# Altium PCB Microcontroller_Redo.PcbDoc
Units mil, origin at the board's own origin, x right, y up, seen from the top; angles counter-clockwise.
Board outline 3346.46 x 3346.46 mil, 2 copper layers (Top Layer, Bottom Layer); 32 components, 73 nets, 320 pads, 160 vias.
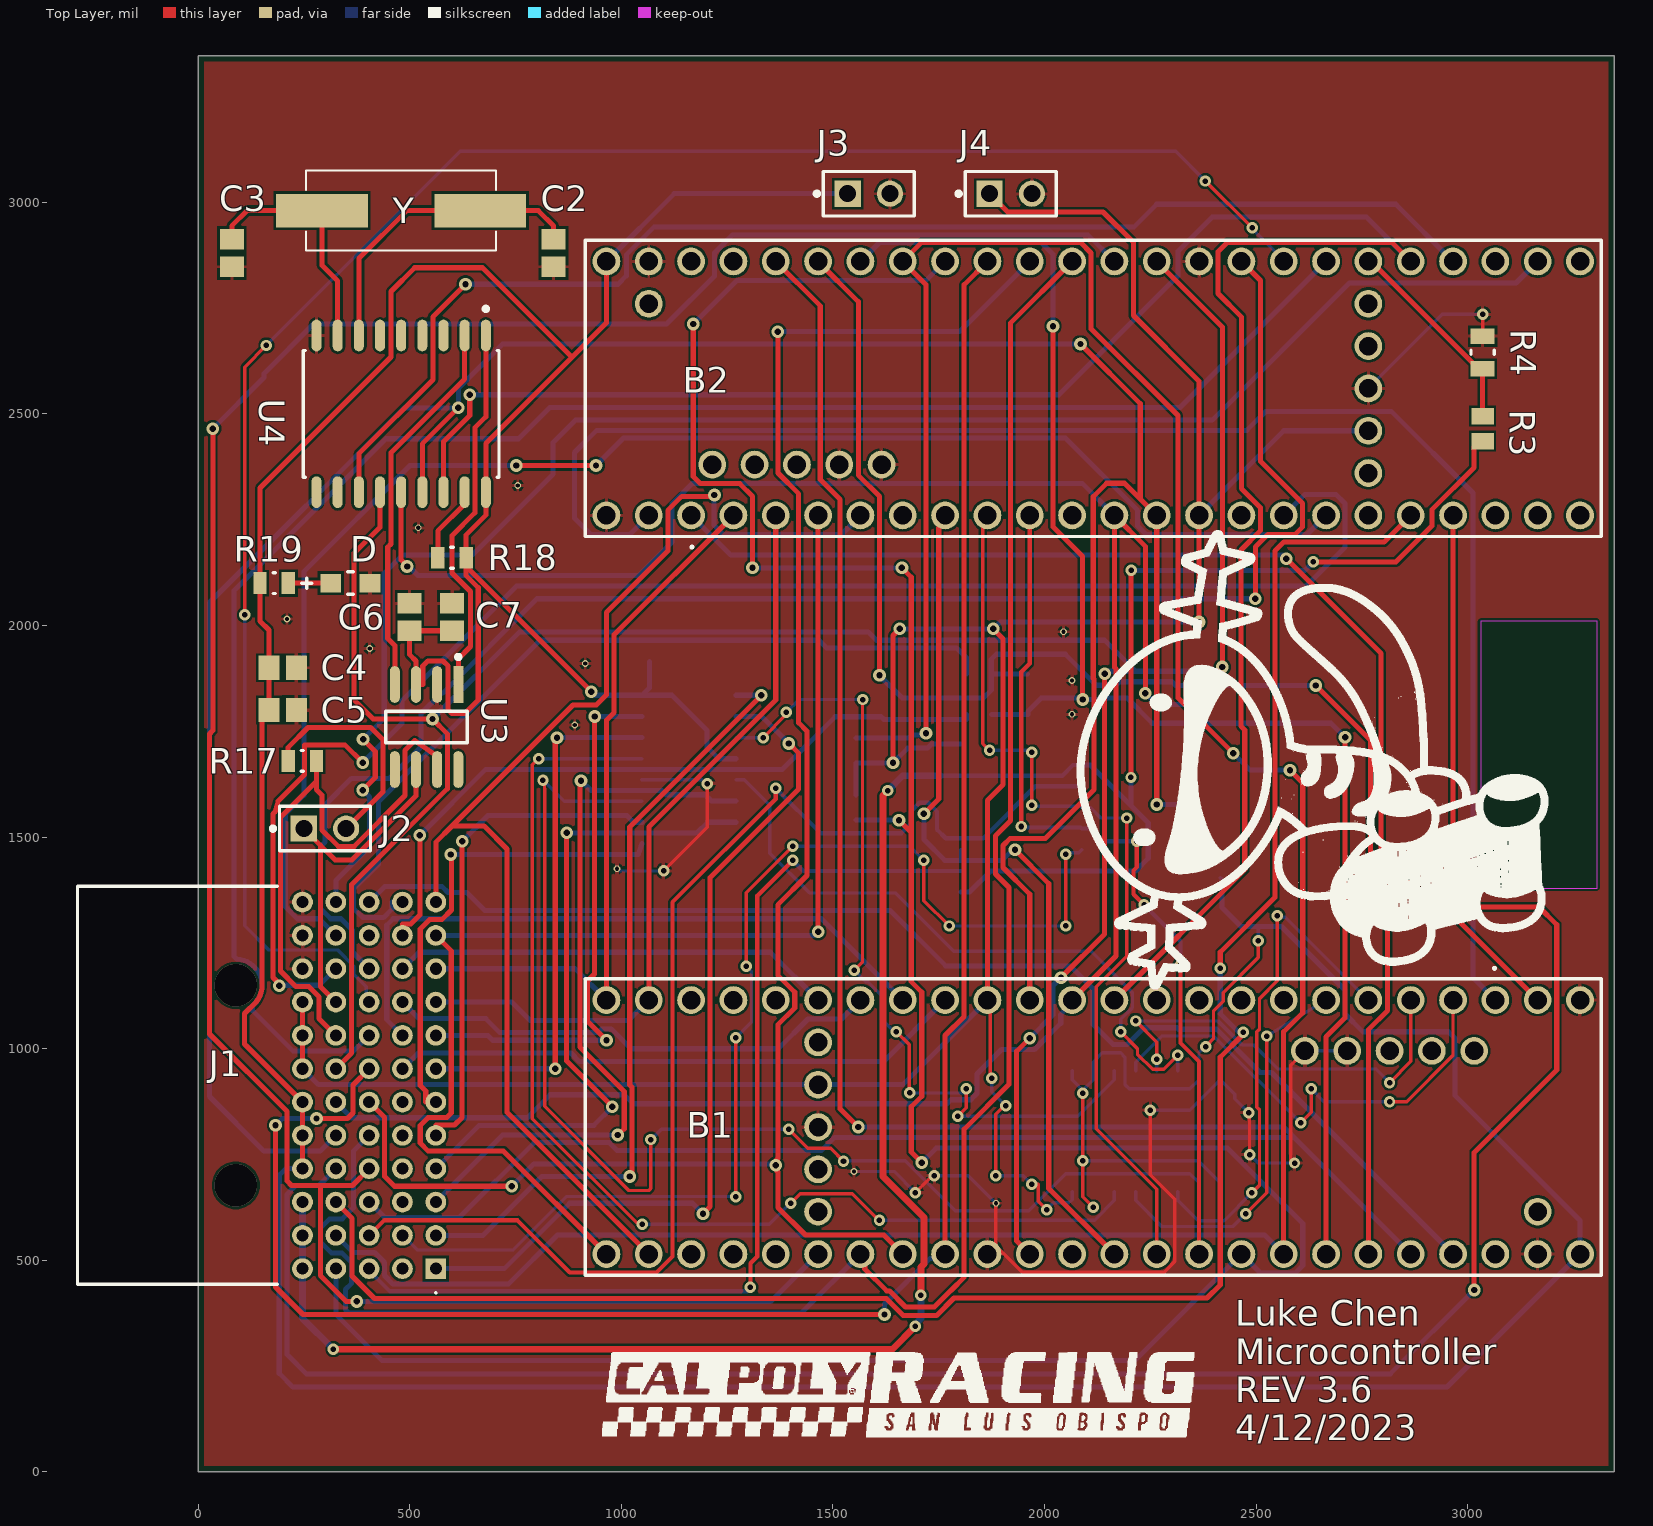
[diagram p0: Top Layer view]
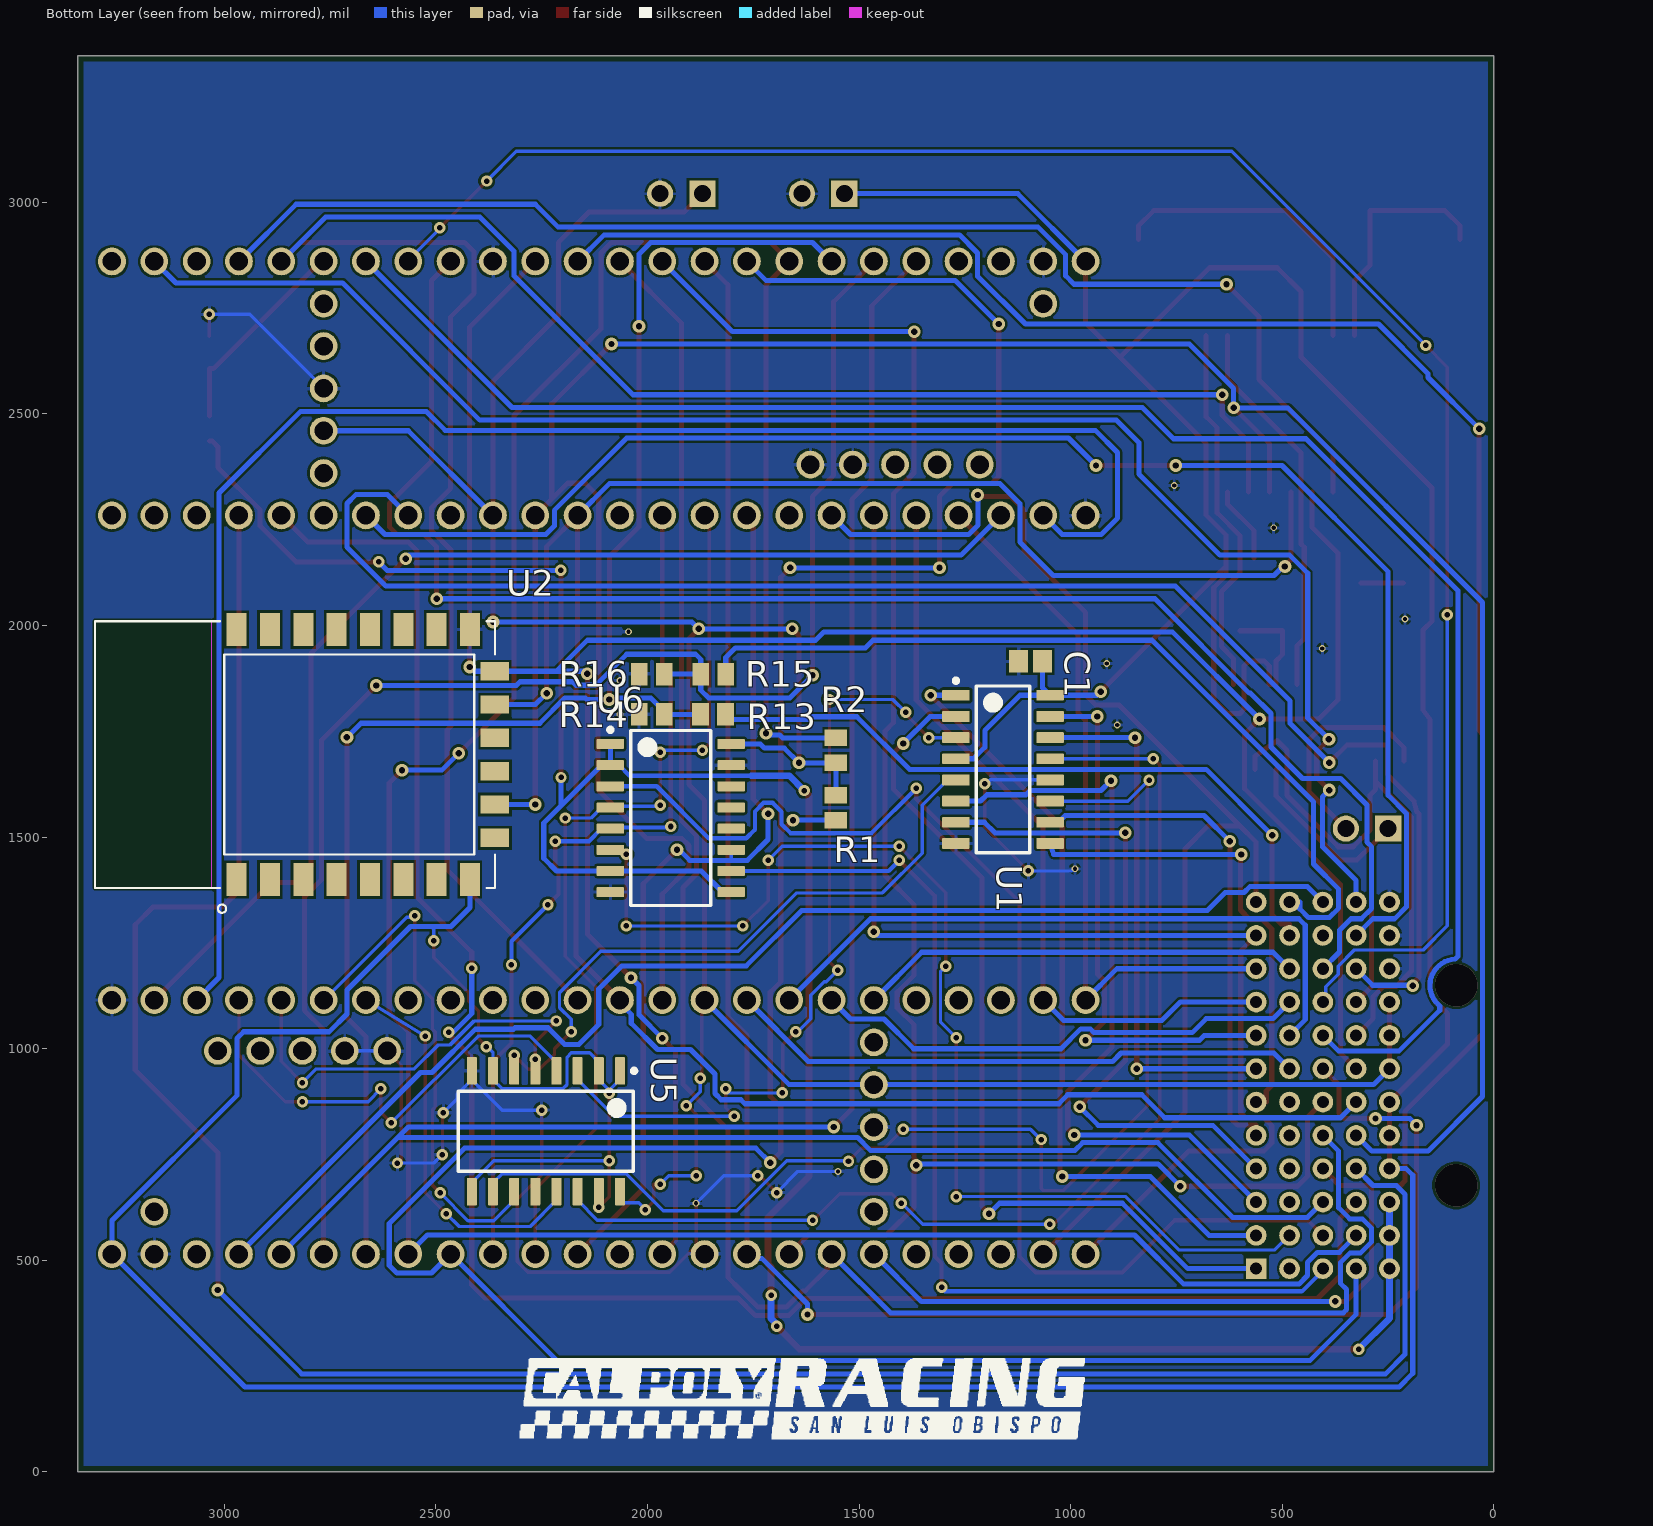
[diagram p1: Bottom Layer view, seen from below]

## Layer stack, top to bottom
Top Solder: solder mask 0.4, Solder Resist, Dk 3.5
Top Layer: signal copper 1.4
Dielectric 1: dielectric 12.6, FR-4, Dk 4.8
Bottom Layer: signal copper 1.4
Bottom Solder: solder mask 0.4, Solder Resist, Dk 3.5

## Board outline
0,0 0,3346.46 3346.46,3346.46 3346.46,0

## Design rules (kind name [scope] priority, off if disabled: settings)
BoardOutlineClearance [All] p1: gap=15 ignorepadtopadclearanceinfootprint=FALSE
Clearance [All] p1: gap=6 ignorepadtopadclearanceinfootprint=FALSE except(0: Arc-Hole Track-Hole SMDPad-Hole THPad-Hole Via-Hole Fill-Hole Poly-Hole Region-Hole Text-Hole)
ComponentClearance [All] p1: gap=1 collisioncheckmode=3 verticalgap=1 showdistances=FALSE
DiffPairsRouting [All] p1: maxlimit=393.7 minlimit=6 mostfreqgap=8 toplayer_minwidth=6 toplayer_maxwidth=15 toplayer_prefwidth=8 bottomlayer_minwidth=6 bottomlayer_maxwidth=15 bottomlayer_prefwidth=8 maxuncoupledlength=500
HoleSize [All] p1: absolutevalues=TRUE maxlimit=265 minlimit=13 maxpercent=80.000 minpercent=20.000
HoleToHoleClearance [All] p1: gap=10 allowstackedmicrovias=FALSE
MinimumAnnularRing [All] p1: minimumring=7
MinimumSolderMaskSliver [All] p1: minsoldermaskwidth=0
PlaneClearance [All] p1: clearance=10
PlaneConnect [All] p1: planeconnectstyle=Direct reliefexpansion=16 reliefentries=4 reliefconductorwidth=6 reliefairgap=6
PolygonConnect [All] p1: connectstyle=Relief reliefconductorwidth=8 reliefentries=4 polygonreliefangle="90 Angle" airgapwidth=6
RoutingCorners [All] p1: cornerstyle=45-Degree minsetback=49.21 maxsetback=49.21
RoutingVias [All] p1: holewidth=15 width=30 viastyle="Through Hole" minholewidth=13 minwidth=27 maxholewidth=100 maxwidth=114
SilkToSilkClearance [All] p1: silktosilkclearance=0
SilkToSolderMaskClearance [IsPad] p1: minsilkscreentomaskgap=6 clearancetoexposedcopper=TRUE
SolderMaskExpansion [All] p1: expansion=2.95 istentingtop=FALSE
Width Width_3 [InNet('GND')] p1: maxlimit=400 minlimit=8 preferedwidth=16 minimp=50.000000 maximp=50.000000 favimp=50.000000
Width Width_2 [All] p2: maxlimit=400 minlimit=8 preferedwidth=12 minimp=50.000000 maximp=50.000000 favimp=50.000000
Width Width_1 [InNet('+5')] p3: maxlimit=400 minlimit=8 preferedwidth=16 minimp=50.000000 maximp=50.000000 favimp=50.000000
Width [InNet('+3V3')] p4: maxlimit=400 minlimit=8 preferedwidth=16 minimp=50.000000 maximp=50.000000 favimp=50.000000
20 further rules are at their usual default settings.

## Classes and differential pairs
component class UniConnector: J1 J3 J4
component class Sheet3: R3 R4 R13 R14 R15 R16 U6
component class Sheet2: B2 U2
component class Sheet1: B1 C1 R1 R2 U1 U5
component class CAN_module: C2 C3 C4 C5 C6 C7 D J2 R17 R18 R19 U3 U4 Y

## Components (designator, comment, footprint, x,y, rotation, side; value= is the part's Value field where it differs from the comment)
B1 "TEENSY_4.1" TEENSY41 3065,1115 r180 top
B2 "TEENSY_4.1" TEENSY41 1165,2260 r0 top
C1 "0.1uF_DLR" CAPC2013X94X50LL20T25 1095,1915 r0 bottom
C2 "22pf_MCP1" CAPC2013X145X50NL20T20 840,2880 r270 top
C3 "22pf_MCP2" CAPC2013X145X50NL20T20 80,2880 r270 top
C4 "10uf_MCP" CAPC2013X145X50NL20T20 200,1900 r180 top
C5 "0.1uf_MCP" CAPC2013X145X50NL20T20 200,1800 r180 top
C6 "10uf_TJA" CAPC2013X145X50NL20T20 500,2020 r270 top
C7 "0.1uf_TJA" CAPC2013X145X50NL20T20 600,2020 r270 top
D "APT2012MGC" FP-APT2012MGC-MFG 360,2100 r0 top
J1 "5223004-2" 52230042 561.81,480.31 r270 top locked
J2 "TSW-102-07-L-S" FP-TSW-102-07-L-S-MFG 300,1520 r0 top
J3 "TSW-102-07-L-S" FP-TSW-102-07-L-S-MFG 1585,3020 r0 top
J4 "TSW-102-07-L-S" FP-TSW-102-07-L-S-MFG 1920,3020 r0 top
R1 "4.7k_SCL" RESC2013X60X40LL20T25 1555,1705 r270 bottom
R2 "4.7k_SDA" RESC2013X60X40LL20T25 1555,1569.53 r90 bottom
R3 "10k_RBP_VD1" RESC2013X60X40LL20T25 3035,2465 r270 top
R4 "5100" FP-CRCW0805-e3-MFG 3035,2645 r270 top
R13 "10k_FBP_VD1" RESC2013X60X40LL20T25 1845,1790 r180 bottom
R14 "10k_FBP_VD2" RESC2013X60X40LL20T25 1990,1790 r180 bottom
R15 "10k_RBP_VD1" RESC2013X60X40LL20T25 1844.53,1885 r180 bottom
R16 "10k_RBP_VD2" RESC2013X60X40LL20T25 1989.53,1885 r180 bottom
R17 "120_MCP" FP-CRCW0805-e3-IPC_C 246.5,1680 r180 top
R18 "10k_MCP1" FP-CRCW0805-e3-IPC_C 600,2160 r0 top
R19 "10k_MCP2" FP-CRCW0805-e3-IPC_C 180,2100 r0 top
U1 "AM26LS32ACDR" D0016A_M 1160,1660 r180 bottom
U2 "ESP8266-12E/ESP-12E" XCVR_ESP8266-12E/ESP-12E 2695,1695 r90 bottom
U3 "TJA1050T/CM,118" FP-SOT96-1-IPC_A 540,1760 r270 top
U4 "MCP2515-I/SO" FP-C04-051-MFG 480,2500 r270 top
U5 "CD40109BNSR" NS0016A_N 2240,805 r270 bottom
U6 "CD40109BNSR" NS0016A_N 1945,1545 r180 bottom
Y "ECS-80-20-5PXDU-TR" XTAL_ECS-80-20-5PXDU-TR 480,2980 r0 top

## Footprints (in the part's own frame and the unit in brackets; to place one, negate y for a bottom-side part, rotate by r counter-clockwise, add the part's x,y. Pads: shape width x height; smd on the part's side, far side on the other; paste and mask are expansions set on the pad)
52230042 [mm]
  rect 1.243x1.243 hole 0.725: A1(0,0)
  round 1.243 hole 0.725: A2(-2,0) A3(-4,0) A4(-6,0) A5(-8,0) A6(-10,0) A7(-12,0) A8(-14,0) A9(-16,0) A10(-18,0) A11(-20,0) A12(-22,0) B1(0,-2) B2(-2,-2) B3(-4,-2) B4(-6,-2) B5(-8,-2) B6(-10,-2) B7(-12,-2) B8(-14,-2) B9(-16,-2) B10(-18,-2) B11(-20,-2) B12(-22,-2) C1(0,-4) C2(-2,-4) C3(-4,-4) C4(-6,-4) C5(-8,-4) C6(-10,-4) C7(-12,-4) C8(-14,-4) C9(-16,-4) C10(-18,-4) C11(-20,-4) C12(-22,-4) D1(0,-6) D2(-2,-6) D3(-4,-6) D4(-6,-6) D5(-8,-6) D6(-10,-6) D7(-12,-6) D8(-14,-6) D9(-16,-6) D10(-18,-6) D11(-20,-6) D12(-22,-6) E1(0,-8) E2(-2,-8) E3(-4,-8) E4(-6,-8) E5(-8,-8) E6(-10,-8) E7(-12,-8) E8(-14,-8) E9(-16,-8) E10(-18,-8) E11(-20,-8) E12(-22,-8)
  silkscreen extent -22.94,-21.5 1.5,0.05
CAPC2013X94X50LL20T25 [mm] "Chip Capacitor, 2-Leads, Body 2.01x1.25mm, IPC High Density"
  rect 1.15x1.35 smd: 1(-0.725,0) 2(0.725,0)
  body extent -1.1,-0.72 1.1,0.72, height 0.94
CAPC2013X145X50NL20T20 [mm] "Chip Capacitor, 2-Leads, Body 2.00x1.25mm, IPC Medium Density"
  rect 1.25x1.45 smd: 1(-0.825,0) 2(0.825,0)
  body extent -1.1,-0.72 1.1,0.72, height 1.45
D0016A_M [mm] "SOIC, 16-Leads, Body 10x4mm, Pitch 1.27mm, IPC Low Density"
  rrect15% 1.65x0.65 smd: 1(-2.825,4.445) 2(-2.825,3.175) 3(-2.825,1.905) 4(-2.825,0.635) 5(-2.825,-0.635) 6(-2.825,-1.905) 7(-2.825,-3.175) 8(-2.825,-4.445) 9(2.825,-4.445) 10(2.825,-3.175) 11(2.825,-1.905) 12(2.825,-0.635) 13(2.825,0.635) 14(2.825,1.905) 15(2.825,3.175) 16(2.825,4.445)
  silkscreen extent -2.95,-5 1.6,5.44, body extent -3,-4.95 3,4.95, height 1.59
FP-APT2012MGC-MFG [mm]
  rect 1.25x1.1 smd paste+0 mask+0: 1(-1.175,0) 2(1.175,0)
  silkscreen extent -2.93,-0.67 0.18,0.67, body extent -1.9,-0.77 1.9,0.77, height 0.25
FP-C04-051-MFG [mm]
  rrect100% 1.9x0.6 smd paste+0 mask+0: 1(-4.7,5.08) 2(-4.7,3.81) 3(-4.7,2.54) 4(-4.7,1.27) 5(-4.7,0) 6(-4.7,-1.27) 7(-4.7,-2.54) 8(-4.7,-3.81) 9(-4.7,-5.08) 10(4.7,-5.08) 11(4.7,-3.81) 12(4.7,-2.54) 13(4.7,-1.27) 14(4.7,0) 15(4.7,1.27) 16(4.7,2.54) 17(4.7,3.81) 18(4.7,5.08)
  silkscreen extent -6.42,-5.88 3.8,5.88, body extent -5.75,-6.12 5.75,6.12, height 0.25
FP-CRCW0805-e3-IPC_C [mil]
  rect 31.75x51.5 smd paste+0 mask+0: 1(-33.5,0) 2(33.5,0)
  silkscreen extent -3,-25 3,25, body extent -53,-31 53,31, height 10
FP-CRCW0805-e3-MFG [mm]
  rect 0.95x1.45 smd paste+0 mask+0: 1(-0.975,0) 2(0.975,0)
  silkscreen extent -0.13,-0.7 0.13,0.7, body extent -1.55,-0.82 1.55,0.82, height 0.25
FP-SOT96-1-IPC_A [mil]
  rect 86.79x23.94 smd paste+0 mask+0: 1(-100.43,75)
  rrect100% 86.79x23.94 smd paste+0 mask+0: 2(-100.43,25) 3(-100.43,-25) 4(-100.43,-75) 5(100.43,-75) 6(100.43,-25) 7(100.43,25) 8(100.43,75)
  silkscreen extent -170,-96 37,96, body extent -164,-116 164,116, height 10
FP-TSW-102-07-L-S-MFG [mm]
  rect 1.57x1.57 hole 1.02 paste-1000 mask+0: 1(-1.27,0)
  round 1.57 hole 1.02 paste-1000 mask+0: 2(1.27,0)
  silkscreen extent -3.25,-1.34 2.73,1.34, body extent -2.83,-1.44 2.83,1.44, height 0.25
NS0016A_N [mm] "SOIC,16-Leads,Body 10.5x5.6mm,Pitch 1.27mm,IPC Medium Density"
  rrect17% 1.65x0.6 smd: 1(-3.625,4.445) 2(-3.625,3.175) 3(-3.625,1.905) 4(-3.625,0.635) 5(-3.625,-0.635) 6(-3.625,-1.905) 7(-3.625,-3.175) 8(-3.625,-4.445) 9(3.625,-4.445) 10(3.625,-3.175) 11(3.625,-1.905) 12(3.625,-0.635) 13(3.625,0.635) 14(3.625,1.905) 15(3.625,3.175) 16(3.625,4.445)
  silkscreen extent -3.75,-5.25 2.4,5.42, body extent -2.8,-5.25 2.8,5.25, height 2
RESC2013X60X40LL20T25 [mm] "Chip Resistor, 2-Leads, Body 2.00x1.25mm, IPC High Density"
  rect 1x1.35 smd: 1(-0.75,0) 2(0.75,0)
  body extent -1.1,-0.72 1.1,0.72, height 0.6
TEENSY41 [mm]
  round 1.665 hole 1.11: 1(0,0) 2(2.54,0) 3(5.08,0) 4(7.62,0) 5(10.16,0) 6(12.7,0) 7(15.24,0) 8(17.78,0) 9(20.32,0) 10(22.86,0) 11(25.4,0) 12(27.94,0) 13(27.94,15.24) 14(25.4,15.24) 15(22.86,15.24) 16(20.32,15.24) 17(17.78,15.24) 18(15.24,15.24) 19(12.7,15.24) 20(10.16,15.24) 21(7.62,15.24) 22(5.08,15.24) 23(2.54,15.24) 24(33.02,0) 25(35.56,0) 26(38.1,0) 27(40.64,0) 28(43.18,0) 29(45.72,0) 30(48.26,0) 31(50.8,0) 32(53.34,0) 33(53.34,15.24) 34(50.8,15.24) 35(48.26,15.24) 36(45.72,15.24) 37(43.18,15.24) 38(40.64,15.24) 39(38.1,15.24) 40(35.56,15.24) 41(33.02,15.24) 42(30.48,0) 43(40.64,2.54) 44(40.64,5.08) 45(40.64,7.62) 46(40.64,10.16) 47(40.64,12.7) 48(11.43,3.05) 49(8.89,3.05) 50(6.35,3.05) 51(3.81,3.05) 52(1.27,3.05) 53(0,15.24) 55(-5.08,15.24) 57(-2.54,0) 68(-2.54,12.7) 69(30.48,15.24) 70(-2.54,15.24) 71(-5.08,0)
  silkscreen extent -6.35,-1.95 54.61,16.51
XCVR_ESP8266-12E/ESP-12E [mm]
  rect 2x1.2 smd: 1(-7.5,7) 2(-7.5,5) 3(-7.5,3) 4(-7.5,1) 5(-7.5,-1) 6(-7.5,-3) 7(-7.5,-5) 8(-7.5,-7) 15(7.5,-7) 16(7.5,-5) 17(7.5,-3) 18(7.5,-1) 19(7.5,1) 20(7.5,3) 21(7.5,5) 22(7.5,7)
  rect 1.1x1.7 smd: 9(-5,-8.5) 10(-3,-8.5) 11(-1,-8.5) 12(1,-8.5) 13(3,-8.5) 14(5,-8.5)
  Keep-Out Layer region: 8,8.51 -8.009,8.51 -8.009,15.5 8,15.5
  Keep-Out Layer region: 8,8.51 -8.009,8.51 -8.009,15.5 8,15.5
  silkscreen extent -9.5,-8.5 8,15.5, body extent -8,-12 8,12, height 3
XTAL_ECS-80-20-5PXDU-TR [mm]
  rect 5.5x2 smd: 1(-4.75,0) 2(4.75,0)
  silkscreen extent -5.7,-2.4 5.7,2.4

## Part data
B1 B2: "Teensy 4.1 Development Board", Manufacturer_Name=PJRC, Manufacturer_Part_Number="TEENSY 4.1", Datasheet Link=https://www.pjrc.com/store/teensy41.html
C1: library part CMP-2007-04345-1, Manufacturer="AVX Interconnect / Elco", Part Number=08055A6R2CAT2A
C2 C3 C4 C5 C6 C7: library part CMP-1036-01227-2, Manufacturer=Vitramon, Part Number=VJ0805A220GXXCW1BC
D: library part CMP-44529-000017-1, "LED GREEN CLEAR CHIP SMD", Case Code (Imperial)=0805, Case Code (Metric)=2012, Color=Green, Forward Current=20mA, Forward Voltage=2.1V, Lens Color=Colorless, Max Operating Temperature=85°C, Min Operating Temperature=-40°C, Package Quantity=2000, Power Rating=75mW, Case/Package=0805, Dominant Wavelength=570nm, Height=0.75mm, Illumination Color=Green, Lead Free="Lead Free", Length=2mm, Lens Style=Clear, Lens Transparency=Clear, Luminous Intensity=70mcd, Mount="Surface Mount", Packaging="Tape and Reel", Test Current=20mA, Viewing Angle=120°, Width=1.25mm
J1: "Conn Backplane RCP 60 POS 2mm Solder RA Thru-Hole Tube", Manufacturer_Name="TE Connectivity", Mouser Part Number=571-5223004-2, Datasheet Link=https://www.te.com/commerce/DocumentDelivery/DDEController?Action=srchrtrv&DocNm=5223004&DocType=Customer+Drawing&DocLang=English, Geometry.Height=14mm, Manufacturer_Part_Number=5223004-2, Mouser Price/Stock=https://www.mouser.co.uk/ProductDetail/TE-Connectivity/5223004-2?qs=oNRo%252BTjlpTO6tP0xSX%252BI3w%3D%3D
J2 J3 J4: library part CMP-02766-001428-1, "CONN HEADER VERT 2POS 2.54MM", Color=Black, Current Rating=7.6A, Max Operating Temperature=125°C, Max Voltage Rating (AC)=550V, Min Operating Temperature=-55°C, Package Quantity=1, Connector Type="Male Pin", Contact Material=Bronze, Contact Mating Length=0.23inch, Contact Plating=Gold, Contact Type="Male Pin", Depth=2.54mm, Gender=Male, Housing Color=Black, Housing Material=Polyester, Lead Free="Lead Free", Length=5.08mm, Max Current Rating=7.6A, Mount="Through Hole", Number of Contacts=2, Number of Positions=2, Number of Rows=1, Orientation=Straight, Packaging=Bulk, Pitch=2.54mm, Radiation Hardening=No, REACH SVHC="No SVHC", RoHS Compliant=Yes, Series=TSW, Termination=Solder, Voltage Rating=550V, Width=2.54mm
R1 R2 R3 R13 R14 R15 R16: library part CMP-2001-00877-1, Manufacturer=Panasonic, Part Number=ERA6AEB7870V
R4: library part CMP-2001-04024-2, "RES Thick Film, 5.1kΩ, 1%, 0.125W, 100ppm/°C, 0805 CRCW08055K10FKEA", Case Code (Imperial)=0805, Case Code (Metric)=2012, Max Operating Temperature=155°C, Max Power Dissipation=125mW, Min Operating Temperature=-55°C, Package Quantity=10, Resistance=5.1kR, Temperature Coefficient=100ppm/°C, Tolerance=1%, Voltage Rating=150V, Case/Package=0805, Composition="Thick Film", Contact Plating=Tin, Depth=1.25mm, Features="Automotive AEC-Q200", Height=0.45mm, Lead Free="Lead Free", Length=2mm, Military Standard=Not, Mount="Surface Mount", Number of Terminations=2, Packaging="Tape and Reel", Power Rating=125mW, Radiation Hardening=No, Termination=SMD/SMT, Voltage Rating (DC)=150V, Weight=0.000194oz, Width=0.049inch
R17 R18 R19: library part CMP-02407-009256-1, "RES Thick Film, 4.02Ω, 1%, 0.125W, 200ppm/°C, 0805", Case Code (Imperial)=0805, Case Code (Metric)=2012, Max Operating Temperature=155°C, Max Power Dissipation=125mW, Min Operating Temperature=-55°C, Package Quantity=5000, Resistance=4.02R, Temperature Coefficient=200ppm/°C, Tolerance=1%, Voltage Rating=150V, Case/Package=0805, Composition="Thick Film", Contact Plating=Tin, Features="Automotive AEC-Q200", Height=0.02inch, Lead Free="Lead Free", Length=0.079inch, Number of Terminations=2, Packaging="Tape and Reel", Power Rating=125mW, Radiation Hardening=No, Voltage Rating (DC)=150V, Weight=0.000194oz, Width=0.049inch
U1: library part CMP-0310-00258-2, "Quadruple Differential Line Receiver, 0 TX / 4 RX, 0 to 70 degC, 16-Pin SOIC (D), Green (RoHS & no Sb/Br)", Manufacturer="Texas Instruments", Rating=Catalog, Receivers Per Package=4, # of TX/RX="0 TX / 4 RX", Code_JEDEC=MS-012AC, ComponentLink1Description=Datasheet, ComponentLink1URL=http://www.ti.com/general/docs/lit/getliterature.tsp?genericPartNumber=AM26LS32AC&fileType=pdf, ComponentLink2Description="Package Specification", ComponentLink2URL=http://www.ti.com/litv/pdf/mpds178g, DatasheetVersion=SLLS115E, Eco-Plan="Green (RoHS & no Sb/Br)", ICC(Max)(mA)=70, Mounting Technology="Surface Mount", PackageDescription="16-Pin Plastic Small Outline Integrated Circuit, 9.9 x 3.9 mm, Pitch 1.27 mm Pitch", PackageReference=D0016A, PackageVersion="revM, Jun-2011", PartNumber=AM26LS32ACDR, SubFamily=RS-422
U2: "This WiFi module has a 32-bit MCU micro and clock speeds supporting 80 MHz or 160 MHz. Supports the RTOS and integrated Wi-Fi MAC/BB/RF/PA/LNA, and has an on-board antenna.", Package=None, Availability="Not in stock", Check_prices=https://www.snapeda.com/parts/ESP8266-12E/ESP-12E/AI-Thinker/view-part/?ref=eda, MF=AI-Thinker, MP=ESP8266-12E/ESP-12E, Price=None, SnapEDA_Link=https://www.snapeda.com/parts/ESP8266-12E/ESP-12E/AI-Thinker/view-part/?ref=snap
U3: library part CMP-2000-04923-2, "IC TRANSCEIVER HALF 1/1 8SO", Case/Package=SO, Max Operating Temperature=150°C, Max Supply Current=10mA, Max Supply Voltage=5.25V, Min Operating Temperature=-40°C, Min Supply Voltage=4.75V, Package Quantity=2500, Contact Plating=Gold, Data Rate=1Mbps, Interface=CAN, Lead Free="Lead Free", Mount="Surface Mount", Nominal Supply Current=10mA, Number of Pins=8, Number of Receive Buffers=1, Number of Transceivers=1, Number of Transmit Buffers=1, Packaging="Tape and Reel", Radiation Hardening=No, REACH SVHC="No SVHC", Receiver Hysteresis=70mV, Simplex/Duplex="Half Duplex"
U4: library part CMP-0186-00133-3, "IC CAN CONTROLLER W/SPI 18SOIC", Ambient Temperature Range High=+125°C, Ambient Temperature Range Low=-65°C, Manufacturer=Microchip, Max Supply Voltage=5.5V, Min Supply Voltage=2.7V, Nominal Supply Current=10mA, Package=C04-051, Temperature="-40°C to +85°C", Temperature Range High=+85°C, Temperature Range Low=-40°C, Automotive=No, Category=IC, ComponentLink2Description=Datasheet, ComponentLink2URL=http://ww1.microchip.com/downloads/en/DeviceDoc/MCP2515-Stand-Alone-CAN-Controller-with-SPI-20001801J.pdf, Device Class L1="Integrated Circuits (ICs)", Device Class L2="Interface ICs", Device Class L3=Controllers, Digikey Description="IC CAN CONTROLLER W/SPI 18SOIC", Footprint Url=http://ww1.microchip.com/downloads/en/DeviceDoc/18L_SOIC_Wide_7.50_SO_C04-0051D.pdf, Function=Controller, Height=2.65mm, Interface=SPI,CAN, Ipc Land Pattern Name=SOIC127P1030X265-18, Lead Free=Yes, Manufacturer Part Number=MCP2515-I/SO, Mouser Description="CAN Interface IC W/ SPI Interface", Octopart=https://octopart.com/mcp2515-i%2Fso-microchip-430187, RoHS=TRUE, Standoff Height=0.1mm
U5 U6: library part CMP-1527-00005-2, "CMOS Quad Low-to-High Voltage Level Shifter, 3 to 18 V, -55 to 125 degC, 16-Pin SO (NS16), RoHS, Tape and Reel", Manufacturer="Texas Instruments", Package Reference=NS0016A, Temperature Range="-55 to 125 degC", ComponentLink1Description="Manufacturer URL", ComponentLink1URL=www.ti.com, ComponentLink2Description=Datasheet, ComponentLink2URL=http://www.ti.com/lit/ds/symlink/cd40109b.pdf, ComponentLink3Description="Package Specification", ComponentLink3URL=http://www.ti.com/lit/ml/msop002a/msop002a.pdf, DatasheetVersion=SCHS099B, Mounting Technology="Surface Mount", Number of Bits=4, Number of Channels=4, Number of Outputs=4, PackageDescription="16-Pin Plastic Small Outline Package, Body 10.2 x 5.3 mm, Pitch 1.27 mm", PackageVersion=4040062/C, Packing="Tape and Reel", PartNumber=CD40109BNSR, Propagation Delay="240 ns Max.", RoHS=TRUE, VSS="3 to 18 V"
Y: "8MHz Â±30ppm Crystal 20pF 60 Ohms HC-49/US", Package="HC49/US ECS International", Availability=Unavailable, MF="ECS Inc.", MP=ECS-80-20-5PXDU-TR, Price=None, SnapEDA_Link=https://www.snapeda.com/parts/ECS-80-20-5PXDU-TR/ECS%20Inc./view-part/584052/?ref=snap

## Via types
v1: diameter 27, hole 13, Top Layer to Bottom Layer, 79 vias
v2: diameter 30, hole 15, Top Layer to Bottom Layer, 67 vias
v3: diameter 16, hole 10, Top Layer to Bottom Layer, 12 vias
v4: diameter 100, hole 100, Top Layer to Bottom Layer, 2 vias

## Nets (pads, with @x,y where several pads share a name; then routed paths per layer and width w, separated by ;. In a path a pad name is that pad's centre, name@x,y a point inside that pad or via, vN(x,y) a via of type N, cw(c..) or ccw(c..) an arc to the next point about the centre after c; other vN are vias at no path point)
+3V3: B1.42 B1.44 B2.42 B2.44 J1.E7 J1.E8 J1.E9 J4.1 R1.2 R2.2 U5.16 U6.16 | length 6696.4
  Top Layer w8: B1.42 1871.36,1108.64 1871.36,933.64 v1(1875,930) ; v1(1885,700) 1885,845 1905,865 v1(1908.5,865) ; v1(1970,680) 1985,680 1985,640 v1(2005,620)
  Top Layer w12: J1.E7 J1.E8 J1.E9 ; v2(1642,1675.47) 1642,1976 v2(1658,1992) ; B1.42 1865,1586.82 1902,1623.82 1902,1968.33 1879,1991.33 v2(1879,1992) ; J4.1 1913,2977 2138,2977 2210,2905 2210,2732 2365,2577 B2.42 v2(2365,2008)
  Bottom Layer w8: v1(1875,930) 1875,898.5 v1(1908.5,865) ; v1(1885,700) 1950,700 v1(1970,680) ; v1(2005,620) 2020.81,635.81 2057.19,635.81 2065,643.62 U5.16
  Bottom Layer w12: J1.E7 284.61,915 B1.44 1665,915 B1.42 ; R2.2 R1.2 v2(1642,1675.47) 1676.53,1710 1723.18,1710 1733.18,1720 U6.16 ; v2(1658,1992) v2(1879,1992) 1895.03,2008 v2(2365,2008) ; B2.42 2565,2460 B2.44
+5: B1.55 B2.55 C1.1 C4.2 C5.2 C6.2 C7.2 J1.E4 J1.E5 J1.E6 J3.1 R18.2 R19.1 U1.4 U1.16 U2.8 U3.3 U4.18 U5.1 U5.2 U5.7 U5.9 U5.15 | length 12847.6
  Top Layer w8: v1(2090,895) v1(2090,735) 2090,650 v1(2115,625) ; v1(2380.5,1005) 2380.5,1009.5 2385,1009.5 2399,1023.5 2399,1088.51 2422.22,1111.73 2422.22,1132.72 2505,1215.49 v1(2505,1255)
  Top Layer w12: J1.E4 J1.E5 J1.E6 113.51,1007.35 110,1010.87 110,1083.18 117.03,1090.21 132.32,1104.89 ccw(c89.37,1149.61) 151.37,1149.61 151.37,1777.46 C5.2 167.52,1989 146.5,2010.02 R19.1 146.5,2324.5 456,2634 456,2789 512,2845 672,2845 883.5,2633.5 ; C7.2 C6.2 500,1931 515,1916 U3.3 531,1860.43 531,1904 543,1916 579.03,1916 591.03,1904 591.03,1800.97 600,1792 630,1792 662,1824 662,2089 633.5,2117.5 R18.2@633.5,2139.5 ; v2(929.33,1843.67) R18.2@633.5,2139.5 ; B2.55 965,2715 883.5,2633.5 ; R18.2@633.5,2139.5 R18.2 633.5,2214 680,2260.5 U4.18 680,2430 883.5,2633.5
  Bottom Layer w8: U5.1 2065,927.05 v1@2086.36,905.68 ; v1(2090,735) 2362.95,735 2415,682.95 U5.9 ; v1(2090,895) 2093.64,898.64 2093.64,905.68 2115,927.05 U5.2 2115,968.39 2136.81,990.2 2179.78,990.2 2190,979.97 2190,915.46 2200.22,905.24 2343.19,905.24 2365,927.05 U5.7 2365,992.09 2377.91,1005 v1(2380.5,1005) ; U2.8@2415.13,1404 U2.8 ; v1(2505,1255) 2505,1282 2512,1289
  Bottom Layer w12: J1.E4 207.54,716.54 192,701 192,233 224,201 2951,201 B1.55 3265,594 2970,889 2970,1024 2954,1040 2752,1040 2710,1082 2710,1139 2560,1289 2512,1289 2464,1289 2419.41,1333.59 U2.8 ; v2(929.33,1843.67) 938,1835 U1.16 ; B2.55 1125,3020 J3.1 ; C1.1 1066.46,1852.68 U1.16 ; U1.4 1230,1685 1203,1712 1203,1752 1120,1835 U1.16
+8.4: J1.E1 J1.E2 J1.E3 R3.2 U6.1 U6.2 U6.7 U6.9 | length 5958.4
  Top Layer w12: v1(2204.19,1640.81) 2204.19,2129.19 v1(2205,2130) ; v1(2635,2150) 2830,2150 2915,2235 2915,2273.32 3014.43,2372.75 3014.43,2421.79 3028.11,2435.47 R3.2
  Top Layer w16: v1(320,290) 1640.5,290 v1(1695,344.5) ; v1(1630,1610) 1618.22,1598.22 1618.22,697.88 1715,601.11 1715,491.49 1707.9,484.38 v1(1707.9,417.9)
  Bottom Layer w10: 1755,1645 2042.05,1645 2067.05,1670 U6.2
  Bottom Layer w12: U6.9 1822.95,1370 1872.95,1420 U6.7 2215,1420 2245,1450 2245,1533.39 2204.19,1574.19 ; U6.1 U6.2 2108.39,1670 2204.19,1574.19 ; v1(2204.19,1640.81) 2204.19,1574.19 ; v1(2205,2130) 2615,2130 v1(2635,2150)
  Bottom Layer w16: J1.E3 J1.E2 J1.E1 246.85,363.15 v1(320,290) ; v1(1630,1610) 1665,1645 1755,1645 ; v1@1695,350 1707.9,362.9 v1(1707.9,417.9)
ENG_HALL1_IN: J1.C2 U6.3 | length 2929.5
  Top Layer w10: J1.C2 439.8,594.52 755.08,594.52 878.38,471.22 1083.13,471.22 1121.22,509.32 1121.22,1346.22 1365,1590 v1(1365,1615)
  Bottom Layer w10: v1(1365,1615) 1470.69,1509.31 1662.08,1509.31 1683.16,1530.39 1683.16,1559.93 1704.23,1581 1725.77,1581 1746.1,1560.67 1746.1,1517.52 1766.42,1497.19 1855.33,1497.19 1978.14,1620 U6.3
ENG_HALL1_TNC: B1.16 B2.8 U6.4 | length 2149.3
  Top Layer w8: B2.8 1854,2249 1854,1721 v1(1870,1705) ; v1(1970,1575) v1(1970,1700) ; v1(2194.5,1545) 2194.5,1218.61 2122.22,1146.33 2122.22,810.43 2265,667.66 B1.16
  Bottom Layer w8: v1(1870,1705) 1965,1705 v1(1970,1700) ; v1(1970,1575) 1972.5,1572.5 2085.22,1572.5 U6.4 2108.39,1570 2133.39,1545 v1(2194.5,1545)
ENG_HALL2_IN: J1.B2 U6.6 | length 2738.8
  Top Layer w8: v1(1270,650) v1(1270,1025.5) ; v1(1295,1195) 1295,1368.23 v1(1405,1478.23) ; v1(1715,1445) 1715,1350 v1(1775,1290) ; v1(2050,1290) v1(2050,1459.28)
  Bottom Layer w8: J1.B2 517.54,524.59 744.96,524.59 871.37,651 1269,651 v1(1270,650) ; v1(1270,1025.5) 1307.78,1063.28 1307.78,1182.22 v1(1295,1195) ; v1(1405,1478.23) 1681.77,1478.23 v1(1715,1445) ; v1(1775,1290) v1(2050,1290) ; v1(2050,1459.28) 2053.64,1462.91 2080.63,1462.91 U6.6
ENG_HALL2_TNC: B1.17 B2.9 U6.5 | length 2073.3
  Top Layer w10: v1(1945,1525) 1945,1889.98 1965,1909.98 B2.9 ; v1(2218,1490) 2218,1429.2 2210,1421.2 2210,1365 v1(2235,1340) ; v1(2321.22,1198.57) 2321.22,1013.42 2365,969.65 B1.17
  Bottom Layer w10: v1(1945,1525) 1947.5,1522.5 2085.22,1522.5 U6.5 2108.39,1520 2138.39,1490 v1(2218,1490) ; v1(2235,1340) 2321.22,1253.78 v1(2321.22,1198.57)
GND: B1.45 B1.48 B1.49 B1.69 B1.70 B1.71 B2.45 B2.48 B2.49 B2.69 B2.70 B2.71 C1.2 C2.2 C3.2 C4.1 C5.1 C6.1 C7.1 D.2 J1.E10 J1.E11 J1.E12 J3.2 J4.2 R4.1 R14.1 R16.1 U1.8 U1.12 U2.15 U3.2 U4.9 U5.8 U6.8 U6.15 | length 3177.4
  Top Layer w8: v1(1100,1420) 1203.53,1523.53 v1(1203.53,1626.47) ; v1(1695,660) 1735,700 v1(1739.5,700) ; v3(1885,635) 1885,534.51 1947.28,472.22 2282.72,472.22 2307.78,497.28 2307.78,644.68 2250,702.46 v1(2250,855) ; v1(2481.91,848.91) 2482.46,848.91 2483.55,850 2484.28,849.28 v1(2484.28,750) ; v1(2590.5,730) 2586.19,730 2581.5,734.69 2581.5,961.42 B1.48 ; R4.1 v1(3035,2735)
  Bottom Layer w8: v3(990,1425) 992.16,1425 997.16,1420 v1(1100,1420) ; U1.12 1189.86,1635 1198.39,1626.47 v1(1203.53,1626.47) ; v3(1550,710) 1645,710 v1(1695,660) ; v1(1739.5,700) 1820,700 v3(1885,635) ; v1(2250,855) 2342.95,855 U5.8@2415,927.05 ; U5.8 U5.8@2415,927.05 ; v1(2481.91,848.91) 2449.26,881.56 2449.26,892.79 U5.8@2415,927.05 ; v1(2484.28,750) 2485,750 2505,730 v1(2590.5,730) ; B1.48 B1.49 ; B2.45 2940,2735 v1(3035,2735)
  other v3: 890,1765 2065,1790 2065,1870 915,1910 405.49,1945.65 2045,1985 210,2015 520.49,2230.65 755.49,2330.65
LV_Bat_Sense: B2.38 R3.1 R4.2 | length 487
  Top Layer w12: B2.38 2771.77,2860 3025.16,2606.61 R4.2 R3.1
NetB1_1: B1.1 B2.57 | length 3827
  Bottom Layer w12: B2.57 1020,2215 928,2215 889.51,2253.49 889.51,2408.51 941.85,2460.85 2477.85,2460.85 2522,2505 2820,2505 3012,2313 3012,1168 B1.1
NetB1_10: B1.10 B2.37 U4.16 | length 5172.5
  Top Layer w12: U4.16 580,2434 642,2496 v2(642,2545) ; B1.10 2473,1423 2473,1753 2464,1762 2464,2178.22 2509.78,2224 2509.78,2278.55 2465,2323.32 2465,2729 2410,2784 2410,2883 2432,2905 2820,2905 B2.37
  Bottom Layer w12: v2(642,2545) 2034,2545 2315,2826 2315,2884 2396,2965 2760,2965 B2.37
NetB1_11: B1.11 B2.11 J1.D6 U2.13 U4.14 | length 5740
  Top Layer w12: U4.14 480,2155.17 493.98,2141.19 v2(493.98,2139.14) ; B1.11 2169,1219 2169,1897 2165,1901 B2.11 2238,2187 v2(2238,1840)
  Bottom Layer w12: J1.D6 362.61,837 778,837 832.23,891.23 1007.01,891.23 1028.25,870 1770,870 1779.5,879.5 1825.56,879.5 1840.5,894.44 1840.5,940.5 1898,998 1976.18,998 2038.22,1060.04 2038.22,1081.19 2065,1107.97 B1.11 ; v2(493.98,2139.14) 498.37,2139.14 519.51,2118 1041,2118 1120.22,2197.22 1120.22,2288 1167.22,2335 2090,2335 B2.11 ; v2(2238,1840) 2264.89,1813.11 U2.13
NetB1_12: B1.12 B2.12 J1.D5 U2.10 U4.15 | length 6857.8
  Top Layer w12: U4.15 530,2429 v2(615,2514) ; B1.12 1965,1365 1902,1428 1902,1480.18 1918.82,1497 2002,1497 2117,1612 2117,1872.82 2115,1874.82 2115,2304 2147,2336 2189,2336 2226,2299 ; v2(2084.89,2664.89) 2226,2523.78 2226,2299 ; v2(2265,1576.89) B2.12 2226,2299
  Bottom Layer w12: J1.D5 288.31,758 156,758 27,887 27,2054 487,2514 v2(615,2514) 615,2560 719.89,2664.89 v2(2084.89,2664.89) ; v2(2265,1576.89) U2.10
NetB1_13: B1.13 B2.13 J1.D7 U2.14 U4.13 | length 6231.7
  Top Layer w12: J1.D7 363,990.17 363,1388 589,1614 589,1744 v2(554,1779) 414,1779 369,1824 369,2171 430,2232 U4.13 ; B1.13 1934,546 1934,994 v2(1965,1025) ; v2(2039,1168) 2142,1271 v2(2142,1886) ; B2.13 2420,2705 v2(2420,1901.85)
  Bottom Layer w12: v2(554,1779) 760,1985 1583,1985 1603,1965 2142,1965 2215.15,1891.85 ; v2(1965,1025) 2020.22,1080.22 2020.22,1149.22 v2(2039,1168) ; v2(2142,1886) 2147.85,1891.85 2215.15,1891.85 ; v2(2420,1901.85) 2410,1891.85 U2.14 2215.15,1891.85
NetB1_18: B1.18 B2.18 J1.D1 R2.1 | length 6939.7
  Top Layer w12: v2(1170,2712) 1170,2352 1187,2335 1280,2335 1310,2305 v2(1310,2136) ; v2(1656,1540) 1685,1511 ; v2(1663,2136) 1685,2114 1685,1511 ; v2(1710,731) 1685,756 1685,863.01 1709.78,887.78 1709.78,1133.55 1685,1158.32 1685,1511
  Bottom Layer w12: J1.D1 325.59,372.41 435,263 2213,263 B1.18 2510,470 2592,470 2610,488 2610,587 2432,765 1744,765 v2(1710,731) ; v2(1170,2712) 1273.22,2815.22 1720.22,2815.22 B2.18 ; v2(1310,2136) v2(1663,2136) ; R2.1 v2(1656,1540)
NetB1_19: B1.19 B2.19 J1.D2 R1.1 | length 6799.2
  Top Layer w12: v2(1720,1745) 1720,2805 B2.19 1710,2905 2085,2905 2110,2880 2110,2701 2315,2496 2315,1829 v2(2446,1698) ; B1.19 2565,1040 2610,1085 2610,1628 v2(2580,1658)
  Bottom Layer w12: J1.D2 365.65,519 417.22,519 440.8,495.42 440.8,464 460.95,443.85 732.91,443.85 849.07,560 2520,560 B1.19 ; R1.1 1681,1734.53 1688.03,1741.56 1716.56,1741.56 v2(1720,1745) ; v2(2446,1698) 2486,1658 v2(2580,1658)
NetB1_20: B1.20 B2.20 R13.1 R14.2 | length 3702.8
  Top Layer w12: v2(2020,2707) 2020,2233 2090,2163 v2(2090,1825) ; B1.20 2665,1028 2710,1073 v2(2710,1736)
  Bottom Layer w12: B2.20 1609.78,2904.78 1992.22,2904.78 2020,2877 v2(2020,2707) ; R13.1 R14.2 1960.47,1796.89 1992.16,1828.57 2081.55,1828.57 2085.13,1825 2142.69,1825 2146.69,1829 2194.5,1829 2254.5,1769 2677,1769 v2(2710,1736)
NetB1_21: B1.21 B2.21 R15.1 R16.2 | length 3731.5
  Top Layer w12: B2.21 1560,2765 1560,2355 1610,2305 v2(1610,1882) ; v2(2641,1858) 2770,1729 2770,1399 2810,1359 2810,1090 2765,1045 B1.21
  Bottom Layer w12: v2(1610,1882) 1663,1829 1856,1829 1874.06,1847.06 R15.1 ; R16.2 R15.1 ; v2(2641,1858) 2310,1858 2301,1867 2177.28,1867 2169,1858.72 2122.28,1858.72 2049,1932 1886.06,1932 1874.06,1920 R15.1
NetB1_22: B1.22 B2.22 J1.C3 | length 5849.1
  Top Layer w12: B2.22 1470,2755 1470,2345 1517,2298 1517,858 v2(1560,815)
  Bottom Layer w12: J1.C3 441.13,601 617.13,601 794.13,778 971.82,778 989.82,760 1473.32,760 1503.32,790 2590,790 ; v2(1560,815) 2565,815 2590,790 ; B1.22 2590,790
NetB1_23: B1.23 J1.C12 | length 3017.2
  Bottom Layer w12: J1.C12 440.8,1382.92 576.92,1382.92 590.84,1369 635,1369 677.32,1326.68 1635.64,1326.68 1766.55,1195.78 2060.22,1195.78 2115,1141 2115,1057.03 2162.03,1010 2195.56,1010 2235.06,1049.5 2313.22,1049.5 2316.72,1046 2406.63,1046 2508.91,943.72 2536.28,943.72 B1.23
NetB1_24: B1.24 J1.B7 | length 1365.7
  Bottom Layer w12: J1.B7 520.31,990 881,990 901,970 1620,970 B1.24
NetB1_25: B1.25 J1.B8 | length 1580.6
  Bottom Layer w12: J1.B8 446,1068.57 446,1292 461,1307 1473,1307 B1.25
NetB1_26: B1.26 J1.B9 | length 1182.7
  Bottom Layer w12: J1.B9 522.31,1071 680,1071 713,1038 944.82,1038 953.82,1047 976.18,1047 1023.18,1000 1371,1000 1441,1070 1520,1070 B1.26
NetB1_27: B1.27 J1.B10 | length 1044.9
  Bottom Layer w12: J1.B10 522.09,1228 1352,1228 B1.27
NetB1_31: B1.31 B2.3 J1.A9 | length 1810.2
  Top Layer w12: B1.31 1065,1524 1365,1824 B2.3
  Bottom Layer w12: J1.A9 741,1110.24 784.24,1067 1017,1067 B1.31
NetB1_32: B1.32 B2.2 J1.A10 | length 1703.1
  Top Layer w12: B1.32 965,1776 983,1794 983,1978 B2.2
  Bottom Layer w12: J1.A10 891.02,1188.98 B1.32
NetB1_33: B1.33 B2.4 J1.A11 | length 3001
  Top Layer w12: J1.A11 598.28,1231.25 598.28,848 587.83,837.55 544,837.55 525,818.55 525,777 544,758 722,758 B1.33 ; v2(1465,1276) B2.4
  Bottom Layer w12: J1.A11 1456.72,1267.72 v2(1465,1276)
NetB1_34: B1.34 B2.5 J1.A12 | length 3003
  Top Layer w12: J1.A12 561.81,1487.81 600,1526 ; B1.34 730,850 730,1472 676,1526 600,1526 ; v2(1220,2308) 1217,2305 1143,2305 1110,2272 1110,2176 965,2031 965,1836 941,1812 886,1812 600,1526
  Bottom Layer w12: v2(1220,2308) 1219,2307 1219,2237 1241,2215 1520,2215 B2.5
NetB1_38: B1.38 B2.14 J1.C4 | length 5915.1
  Top Layer w12: v2(35,2465) 35,1751.56 27,1743.56 27,1035 210,852 210,688 221,677 289,677 ; v2(375,403) 350,403 289,464 289,677 ; J1.C4 364.79,677 289,677
  Bottom Layer w12: v2(35,2465) 155.72,2585.72 155.72,2594.72 273,2712 1107,2712 1220,2825 1220,2880 1262.78,2922.78 2102.22,2922.78 B2.14 ; v2(375,403) 1353,403 B1.38
NetB1_39: B1.39 B2.15 J1.C5 | length 4678.3
  Top Layer w12: B1.39 1575.25,504.75 1575.25,479.75 1627,428 1633.46,428 1671.46,390 1739.54,390 1778.54,429 1779,429 1810,460 1810,810 1916,916 1916,1381 1884,1413 1884,1503 1920,1539 1920,2715 B2.15
  Bottom Layer w12: J1.C5 367,757.95 367,624 341,598 311,598 289,576 289,544 316,517 340.48,517 363,494.48 363,446 348,431 348,384 356,376 1426,376 B1.39
NetB1_40: B1.40 B2.16 J1.C6 | length 4318.8
  Top Layer w12: J1.C6 441,837.35 441,698 464,675 v2(741,675) ; v2(1365,725) v2@1369.87,725 ; v2(1370,2694) 1370,2360 1419,2311 1419,1769.99 1439,1749.99 1439,1409 1369.87,1339.87 1369.87,1173.45 1409.78,1133.55 1409.78,1096.45 1369.87,1056.55 1369.87,741.03 1368.44,739.6 1368.44,726.43 v2@1369.87,725 ; B1.40 1620.22,559.78 1435.22,559.78 1369.87,625.13 1369.87,708.97 1368.44,710.4 1368.44,723.57 v2@1369.87,725
  Bottom Layer w12: v2(741,675) 794,728 1362,728 v2(1365,725) ; v2(1370,2694) 1799,2694 B2.16
NetB1_41: B1.41 B2.17 J1.C7 | length 4766.9
  Top Layer w12: v2(183,819) 183,437 248,372 v2(1622,372) ; v2(280,835) 353,835 366,848 366,914.43 J1.C7 ; B1.41 1765,1031 1810,1076 1810,2805 B2.17
  Bottom Layer w12: v2(183,819) 199,835 v2(280,835) ; v2(1622,372) 1622,397 1729.75,504.75 1754.75,504.75 B1.41
NetB1_57: B1.57 B2.1 | length 2768.8
  Top Layer w12: v2(2571.33,2157.67) 2795,1934 2795,1431.26 2833.14,1393.12 2886.88,1393.12 B1.57
  Bottom Layer w12: B2.1 1258.99,2166.01 2562.99,2166.01 v2(2571.33,2157.67)
NetB2_23: B2.23
NetB2_24: B2.24
NetB2_25: B2.25 J1.D10 | length 3749.3
  Top Layer w12: v2(191.59,1148.72) 191.59,1153.59 177,1168.19 177,1554.46 179.81,1557.27 182,1559.46 182.86,1562.43 189.51,1585.51 252,1648 252,1718 347,1718 v2(389,1676)
  Bottom Layer w12: v2(191.59,1148.72) 192.87,1150 286.61,1150 J1.D10 ; v2(389,1676) 481.98,1768.98 481.98,1821.98 753,2093 2618,2093 2710,2185 2710,2288 2689,2309 2614,2309 B2.25
NetB2_26: B2.26 J1.D11 | length 3636.9
  Top Layer w12: v2(752,2378) v2(940.28,2378)
  Bottom Layer w12: J1.D11 286.31,1307 234.73,1307 207.09,1334.64 207.09,1555.88 250,1598.78 250,2127 501,2378 v2(752,2378) ; v2(940.28,2378) 1005.14,2442.85 2049.15,2442.85 2220,2272 2220,2235 2240,2215 2620,2215 B2.26
NetB2_28: B2.28 J1.D3 | length 4511.5
  Top Layer w12: J1.D3 364,599.39 364,463 417,410 1626,410 1666,370 1745,370 1786,411 2384,411 2415,442 2415,980 2466.37,1031.37 2466.37,1032.32 2468.29,1034.24 2469.24,1034.24 v1(2469.24,1039.25) ; v1(2415,1190) 2415,1228 2544,1357 2544,2176 2565.22,2197.22 2802.22,2197.22 B2.28
  Bottom Layer w12: v1(2415,1190) 2415,1082.88 2465,1032.88 2465,1035.01 v1(2469.24,1039.25)
NetB2_29: B2.29 J1.D4 | length 5533.1
  Top Layer w12: B2.29 2965,1374 3004,1335 3168,1335 3210,1293 3210,950 3015,755 v2(3015,430)
  Bottom Layer w12: J1.D4 286.05,677 231,677 210,656 210,278 256,232 2817,232 v2(3015,430)
NetB2_34: B2.34 J1.D12 | length 3934.9
  Top Layer w12: v2(389,1611) 418.8,1640.8 418.8,1702.2 v2(390,1731)
  Bottom Layer w12: J1.D12 325.59,1397.59 405,1477 405,1595 v2(389,1611) ; v2(390,1731) 440,1781 440,2123.34 482.8,2166.14 647.14,2166.14 839,2358 839,2432 892,2485 2396,2485 2720,2809 3114,2809 B2.34
NetB2_36: B2.36 U4.12 | length 3091.9
  Top Layer w12: U4.12 380,2405.62 555.01,2580.64 555.01,2729.01 v2(632,2806)
  Bottom Layer w12: v2(632,2806) 992,2806 1012,2826 1012,2876 1077,2941 2211,2941 2265,2995 2830,2995 B2.36
NetB2_39: B2.39 J1.C8 | length 4267.2
  Bottom Layer w12: J1.C8 367.83,995 224,995 128.17,1090.83 128.17,1095.8 128.17,1100.77 131.69,1104.28 131.81,1104.41 ccw(c89.37,1149.61) 91.68,1211.56 88.51,1214.73 85,1218.24 85,2082 444,2441 757,2441 831,2515 2320,2515 B2.39
NetB2_40: B2.40 J1.C9 | length 4494.2
  Top Layer w8: v1(110.5,2025) 110.5,2610.5 v1(161.45,2661.45) ; v1(2380,3050) v1(2490.59,2939.41)
  Bottom Layer w8: v1(110.5,2025) 110,2024.5 110,1290 166.75,1233.25 330.06,1233.25 368.18,1195.13 368.18,1176.38 397.86,1146.7 397.86,1116.71 J1.C9 ; v1(161.45,2661.45) 620,3120 2310,3120 v1(2380,3050) ; v1(2490.59,2939.41) 2490.59,2936.91 2565,2862.5 B2.40
NetB2_41: B2.41 J1.C10 | length 3840.6
  Top Layer w12: B2.41 2510,2815 2510,2387.78 2609.78,2288 2609.78,2233 2592,2215.22 2527.78,2215.22 2498,2185.45 v2(2498,2063)
  Bottom Layer w12: J1.C10 365,1228.31 365,1280 338,1307 313.47,1307 289,1331.47 289,1477 300,1488 300,1576 362.22,1638.22 452.22,1638.22 527,1713 527,1792 575,1840 578,1840 801,2063 v2(2498,2063)
NetC2_1: C2.1 U4.7 Y.2 | length 735.2
  Top Layer w12: U4.7 380,2867 493,2980 Y.2 804,2980 840,2944 C2.1
NetC3_1: C3.1 U4.8 Y.1 | length 569.7
  Top Layer w12: C3.1 80,2944 116,2980 Y.1 292.99,2851.01 330,2814 U4.8
NetD_1: D.1 R19.2 | length 100.2
  Top Layer w12: R19.2 D.1
NetJ1_A1: J1.A1 U1.2 | length 2071
  Top Layer w12: v2(1193,610) 1210,627 1210,1404.5 1419,1613.5 1419,1698 v2(1396,1721)
  Bottom Layer w12: J1.A1 723.32,480.32 878,635 1168,635 v2(1193,610) ; U1.2 1332,1785 v2(1396,1721)
NetJ1_A2: J1.A2 U1.1 | length 1845.5
  Top Layer w12: v2(1020,698) 1025.01,703.01 1025.01,909.23 1020,914.25 1020,1524 v2(1331,1835)
  Bottom Layer w12: J1.A2 673.06,559.06 812,698 v2(1020,698) ; U1.1 v2(1331,1835)
NetJ1_A3: J1.A3 U1.6 | length 1769.6
  Top Layer w12: v2(905,1633) 902.22,1630.22 902.22,1003.72 1007.01,898.94 1007.01,811.01 v2(992,796)
  Bottom Layer w12: J1.A3 720.02,796 v2(992,796) ; v2(905,1633) 905.26,1633 928.46,1609.8 1095.66,1609.8 1105.46,1600 1198,1600 1213,1585 U1.6
NetJ1_A4: J1.A4 U1.7 | length 1580.2
  Top Layer w12: v2(871,1510) 871,971 v2(979,863)
  Bottom Layer w12: J1.A4 664.28,819 935,819 v2(979,863) ; v2(871,1510) 1179,1510 1204,1535 U1.7
NetJ1_A5: J1.A5 U1.10 | length 1203
  Top Layer w12: J1.A5 561.81,819.55 606,819.55 624,837.55 v2(624,1490)
  Bottom Layer w12: v2(624,1490) 685,1551 1013,1551 1029,1535 U1.10
NetJ1_A6: J1.A6 U1.9 | length 1133.1
  Top Layer w12: J1.A6 538,874.02 538,900 525,913 525,1283 547,1305 576,1305 599,1328 599,1457 v2(597,1459)
  Bottom Layer w12: v2(597,1459) 1040,1459 U1.9
NetJ1_A7: J1.A7 U1.14 | length 1266.9
  Top Layer w12: v2(844,952.76) 844,1731 v2(848,1735)
  Bottom Layer w12: J1.A7 v2(844,952.76) ; v2(848,1735) U1.14
NetJ1_A8: J1.A8 U1.15 | length 1310.2
  Top Layer w12: v2(937,1785) 937,1176.78 920.22,1160 920.22,1064.78 v2(965,1020)
  Bottom Layer w12: J1.A8 684.5,1031.5 696,1020 v2(965,1020) ; v2(937,1785) U1.15
NetJ1_B11: J1.B11 R13.2 | length 1687.6
  Top Layer w12: J1.B11 483.07,1295 503,1295 524,1316 v2(524,1504)
  Bottom Layer w12: v2(524,1504) 680,1660 1381,1660 1505.21,1784.21 1614,1784.21 1620.61,1777.61 1815.47,1777.61 R13.2
NetJ1_B12: J1.B12 R15.2 | length 2028.4
  Bottom Layer w12: J1.B12 458.93,1346.46 458.93,1330.39 438.53,1309.99 389.01,1309.99 367,1332 367,1377 426.33,1436.33 426.33,1583.33 808,1965 1466.93,1965 1484.93,1947 1792,1947 1815,1924 R15.2
NetJ1_D8: J1.D8 R17.1 U3.7 | length 1374.4
  Top Layer w12: R17.1 280,1632 ; J1.D8 286,1071.09 286,1122.66 261.96,1146.71 231.79,1146.71 195,1183.5 195,1547 280,1632 ; U3.7 565,1691 512,1728 489,1705 489,1598.09 368,1477.09 332.23,1477.09 293,1516.32 293,1599 280,1612 280,1632
NetJ1_D9: J1.D9 J2.1 U3.6 | length 806.5
  Top Layer w12: J2.1 289,1481 ; J1.D9 289,1146.83 289,1481 ; U3.6 515,1597.47 363.42,1445.9 324.1,1445.9 289,1481
NetJ2_2: J2.2 R17.2 | length 533.1
  Top Layer w12: R17.2 213,1712 259.86,1758.86 408,1758.86 436.8,1730.06 436.8,1606.8 J2.2
NetR18_1: R18.1 U4.17 | length 181.3
  Top Layer w12: R18.1 566.5,2223.5 630,2287 U4.17
NetU3_1: U3.1 U4.1 | length 888
  Top Layer w12: U3.1 615,1921 644,1950 644,2080 600,2124 600,2212 654,2266 654,2467 680,2493 U4.1
NetU3_4: U3.4 U4.2 | length 906.9
  Top Layer w12: U3.4 465,1952.4 448.22,1969.18 448.22,2184.7 456,2192.48 456,2408 630,2582 U4.2
PENC_A: U1.3 U5.3 | length 1977.3
  Top Layer w8: v1(1335,1735) 1390,1790 v1(1390,1795) ; v1(1550,1185) 1570,1205 v1(1570,1825) ; v1(1650,1040) 1680,1010 1680,896.93 v1(1681.43,895.5) ; v1(1795,840.5) 1795.5,840.5 1815,860 v1(1815,905)
  Bottom Layer w8: U1.3 v1(1335,1735) ; v1(1390,1795) 1420,1825 v1(1570,1825) ; v1(1550,1185) 1577.22,1157.78 1582.72,1157.78 1613.86,1126.63 1613.86,1071.14 1645,1040 v1(1650,1040) ; v1(1681.43,895.5) 1810.31,895.5 1815,900.19 v1(1815,905) ; v1(1795,840.5) 2078.45,840.5 2165,927.05 U5.3
PENC_A_3: B1.2 U5.4 | length 1134.8
  Top Layer w8: v1(2605,825) 2630,850 v1(2630,905) ; v1(2815,875) 2855.57,875 2965,984.43 B1.2
  Bottom Layer w8: U5.4 2215,968.39 2276.61,1030 2400,1030 v1(2605,825) ; v1(2630,905) 2660,875 v1(2815,875)
PENC_B: U1.5 U5.6 | length 1545.7
  Top Layer w8: v1(2180,1040) 2219.45,1000.55 2219.45,987.32 2255.27,951.5 2281.5,951.5 v1(2315,985)
  Bottom Layer w8: U1.5 1290.9,1635 1350.67,1575.23 1350.67,1461.97 1444.65,1368 1647,1368 1785.14,1229.86 2110.63,1229.86 2207.78,1132.72 2207.78,1097.28 2180,1069.51 v1(2180,1040) ; U5.6 v1(2315,985)
PENC_B_3: B1.3 U5.5 | length 1014.5
  Top Layer w8: v1(2215,1065.5) 2265,1015.5 v1(2265,975) ; v1(2815,920) 2865,970 B1.3
  Bottom Layer w8: v1(2215,1065.5) 2409.75,1065.5 2466.43,1008.82 2493.8,1008.82 2550.48,952.15 2782.85,952.15 v1(2815,920) ; U5.5 v1(2265,975)
REAR_HALL_IN: J1.C1 U6.10 | length 2387.5
  Top Layer w10: v1(1305,436.5) 1305,493.09 1321.22,509.32 1321.22,1361.22 v1(1405,1445)
  Bottom Layer w10: J1.C1 404.33,476.43 453.91,426.85 1296.85,426.85 1305,435 v1(1305,436.5) ; v1(1405,1445) 1430,1420 U6.10
REAR_HALL_TNC: B1.15 B2.7 U6.11 | length 2110.6
  Top Layer w12: v2(1715,1555) 1750,1590 1750,2230.51 1765,2245.51 B2.7 ; v2(1930,1470) 2010,1390 2010,670 B1.15
  Bottom Layer w8: 1800,1445 1802.28,1447.28 U6.11
  Bottom Layer w12: v2(1715,1555) 1715,1494.09 1764.09,1445 1800,1445 1900.13,1445 1925.13,1470 v2(1930,1470)
SENC_A: U1.11 U5.10 | length 2929.6
  Top Layer w8: v1(815,1634.5) 818.64,1630.86 818.64,1614.36 819,1614 819,863.64 1017.64,665 1065.31,665 1070,669.69 v1(1070,785.5) ; v1(1395.37,810) 1395.37,809.63 1440,765 1494.5,765 v1(1525,734.5)
  Bottom Layer w8: v1(815,1634.5) 815.5,1634.5 865,1585 U1.11 ; v1(1070,785.5) 1070.5,785.5 1095,810 v1(1395.37,810) ; v1(1525,734.5) 1525.5,735 1670.64,735 1788.64,617 1962.46,617 2050.22,704.76 2343.19,704.76 2365,682.95 U5.10
SENC_A_3: B1.4 U5.11 | length 1224.9
  Top Layer w8: v1(2490,660) 2507.78,677.78 2507.78,855.62 2501.5,861.89 2501.5,1039.73 2507.78,1046.01 2507.78,1118.27 2550,1160.49 v1(2550,1314.5)
  Bottom Layer w8: U5.11 2315,641.61 2362.61,594 2424,594 v1(2490,660) ; v1(2550,1314.5) 2553.64,1310.86 2569.14,1310.86 B1.4
SENC_B: U1.13 U5.14 | length 2675.8
  Top Layer w8: v1(805,1685.5) 790,1670.5 790,835 1040,585 1049.5,585 v1(1050,585.5) ; v1(1400,634.5) 1423.28,657.78 1545.32,657.78 1608.1,595 v1(1610,595)
  Bottom Layer w8: v1(805,1685.5) 805.5,1685 U1.13 ; v1(1050,585.5) 1050.5,585 1350,585 1399.5,634.5 v1(1400,634.5) ; v1(1610,595) 2118.39,595 2165,641.61 U5.14
SENC_B_3: B1.5 U5.13 | length 923.1
  Top Layer w8: v1(2475,610) 2525,660 v1(2525,1030)
  Bottom Layer w8: U5.13 2215,641.61 2276.61,580 2445,580 v1(2475,610) ; v1(2525,1030) B1.5
pads on no net: B1.6 B1.7 B1.8 B1.9 B1.14 B1.28 B1.29 B1.30 B1.35 B1.36 B1.37 B1.43 B1.46 B1.47 B1.50 B1.51 B1.52 B1.53 B1.68 B2.6 B2.10 B2.27 B2.30 B2.31 B2.32 B2.33 B2.35 B2.43 B2.46 B2.47 B2.50 B2.51 B2.52 B2.53 B2.68 J1.B1 J1.B3 J1.B4 J1.B5 J1.B6 J1.C11 U2.1 U2.2 U2.3 U2.4 U2.5 U2.6 U2.7 U2.9 U2.11 U2.12 U2.16 U2.17 U2.18 U2.19 U2.20 U2.21 U2.22 U3.5 U3.8 U4.3 U4.4 U4.5 U4.6 U4.10 U4.11 U5.12 U6.12 U6.13 U6.14
copper on no net:
  other v4: 89.37,677.17 89.37,1149.61

## Polygon pours and split planes (outlines as drawn)
GND on Top Layer "GND_L01_P000" (solid, pour order 0): 0,3500 35,3465 3440,3465 3440,15 3425,0 0,0
GND on Bottom Layer "GND_L02_P001" (solid, pour order 1): 0,3565 3485,3565 3505,3545 3505,0 0,0

## Silkscreen, mask and mechanical layers (free items; w line width, h text height)
Top Overlay:
  drawing of 71 lines, arcs and shapes, not listed
  text "Luke Chen / Microcontroller / REV 3.6 / 4/12/2023" at 2450.27,75 h60
Bottom Overlay:
  drawing of 18 lines, arcs and shapes, not listed
Mechanical 1:
  the board outline again, w10